# Altium PCB BattManage.PcbDoc
Units mm, origin at the board's own origin, x right, y up, seen from the top; angles counter-clockwise.
Board outline 63.12 x 72.39 mm, 2 copper layers (Top Layer, Bottom Layer), stack 1.569 mm thick; 61 components, 52 nets, 175 pads, 44 vias.
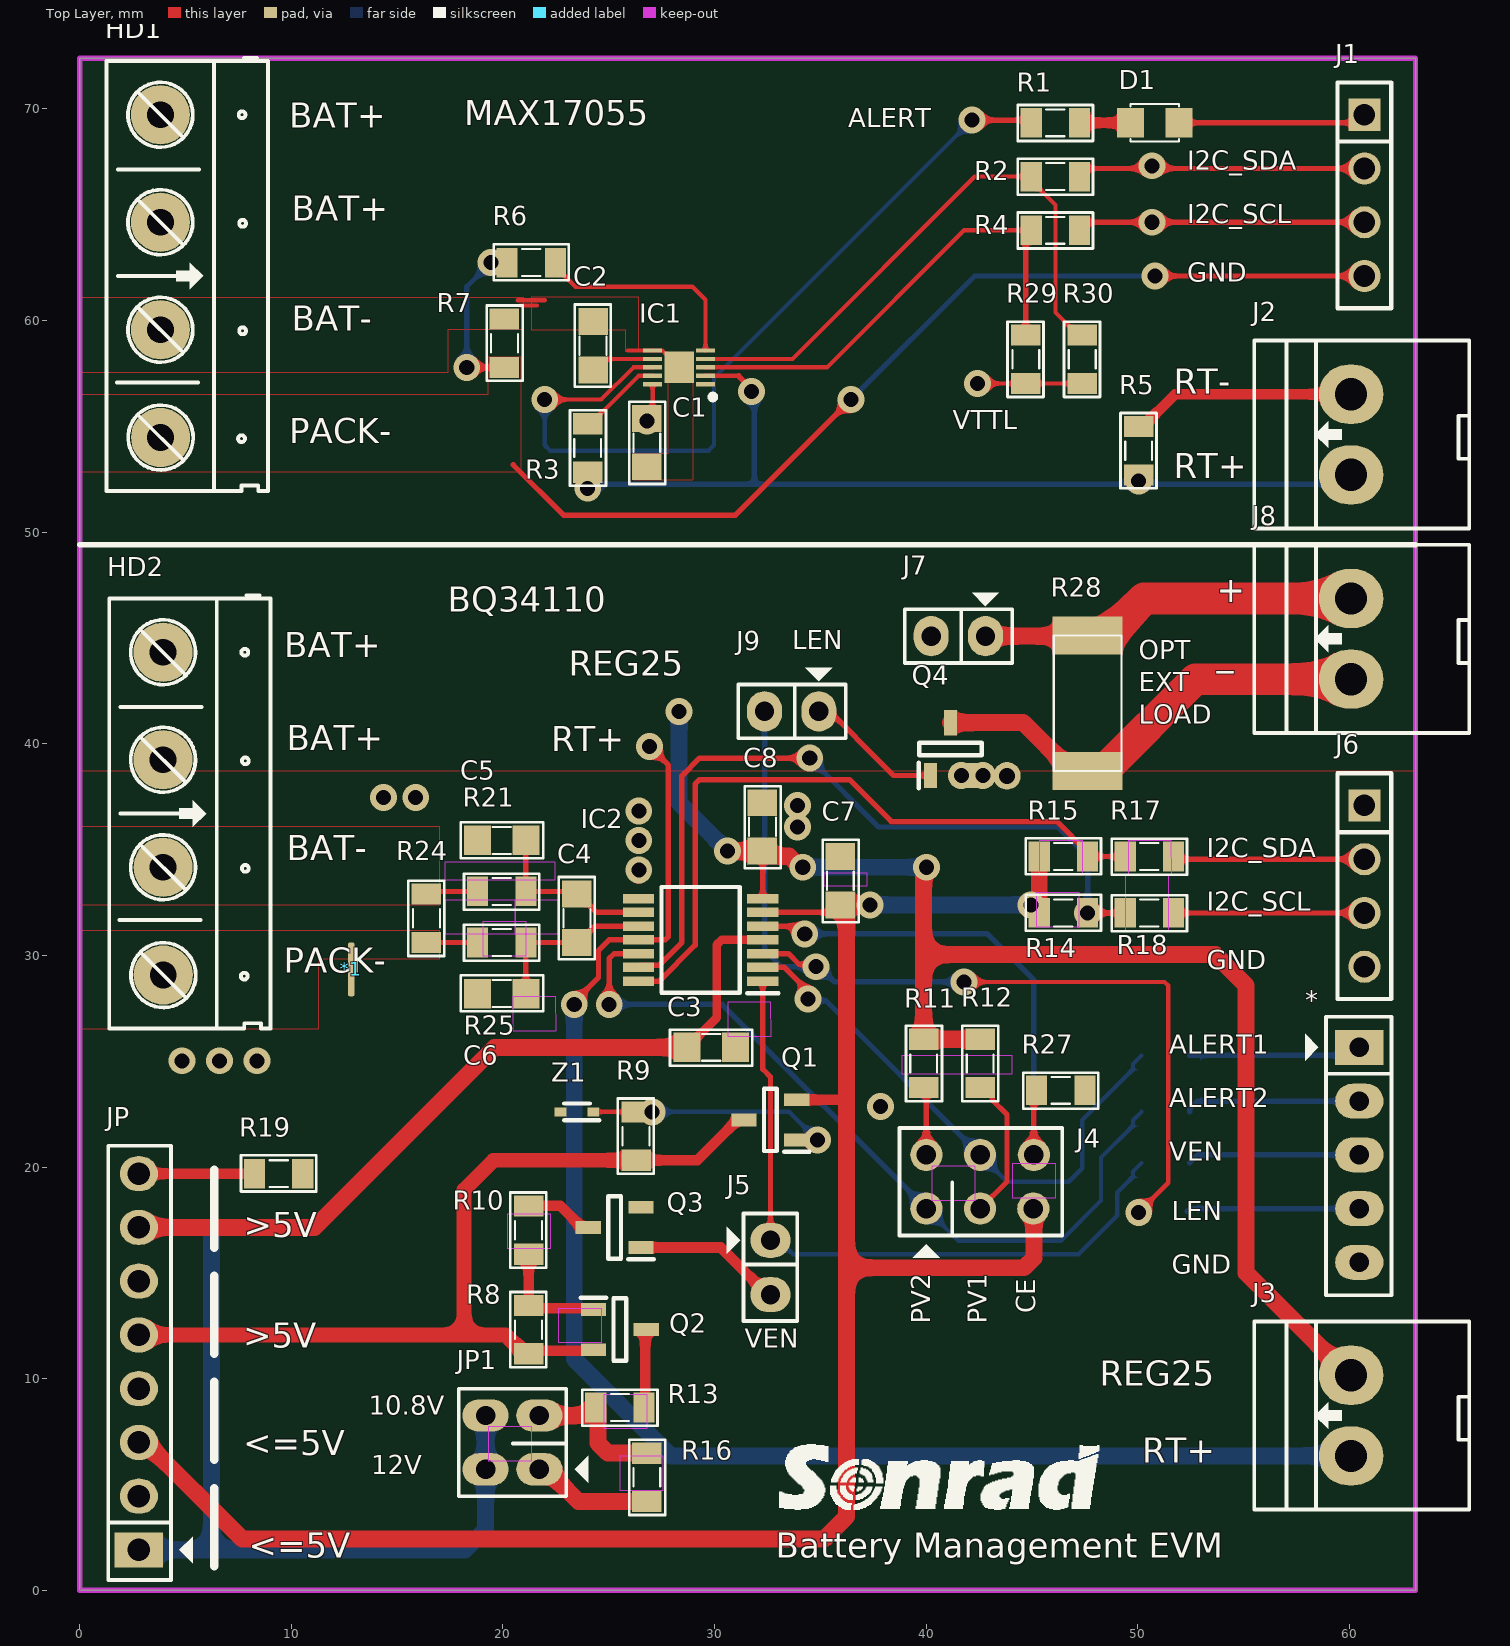
[diagram p0: Top Layer view]
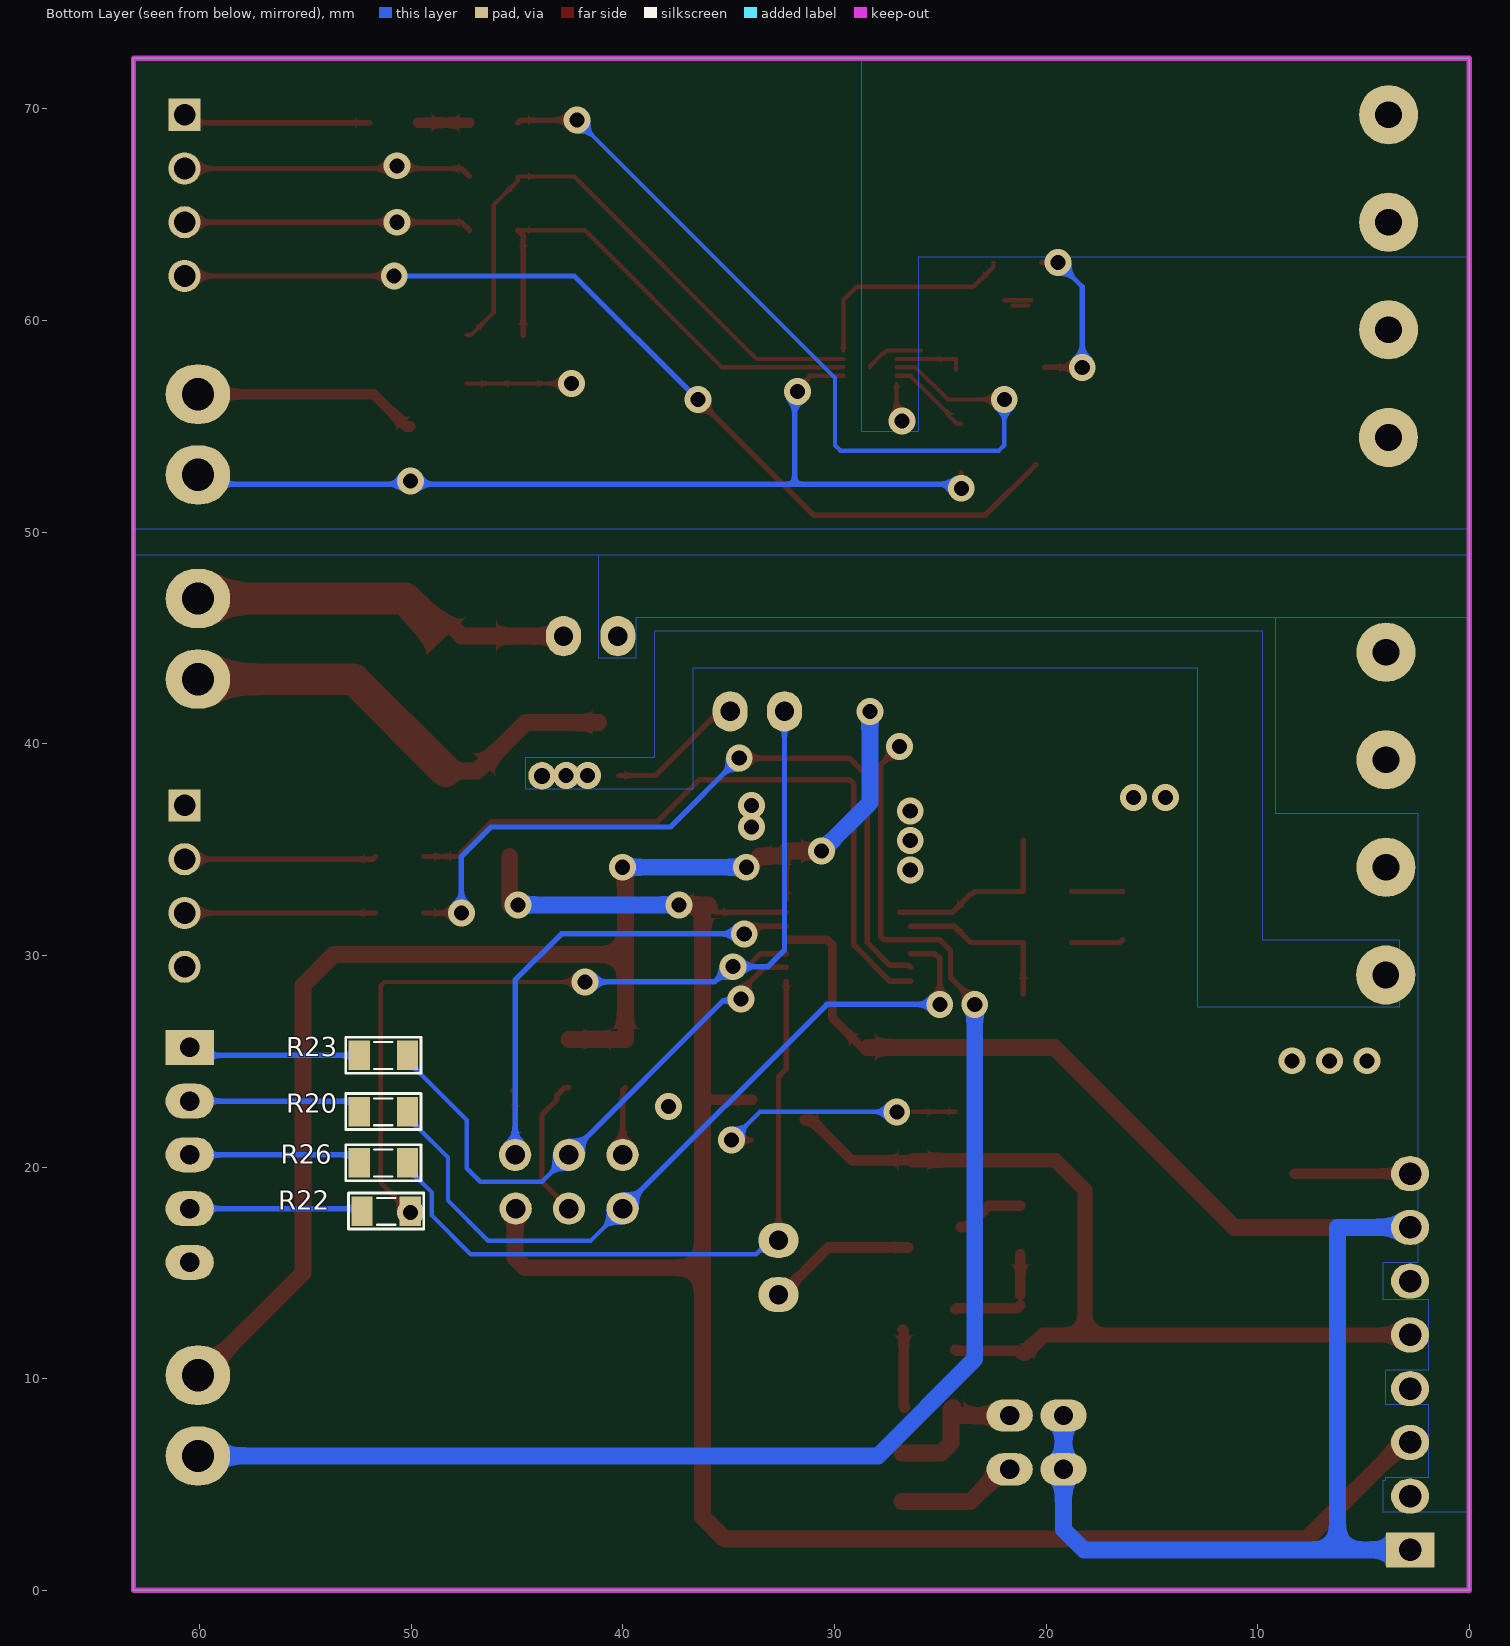
[diagram p1: Bottom Layer view, seen from below]
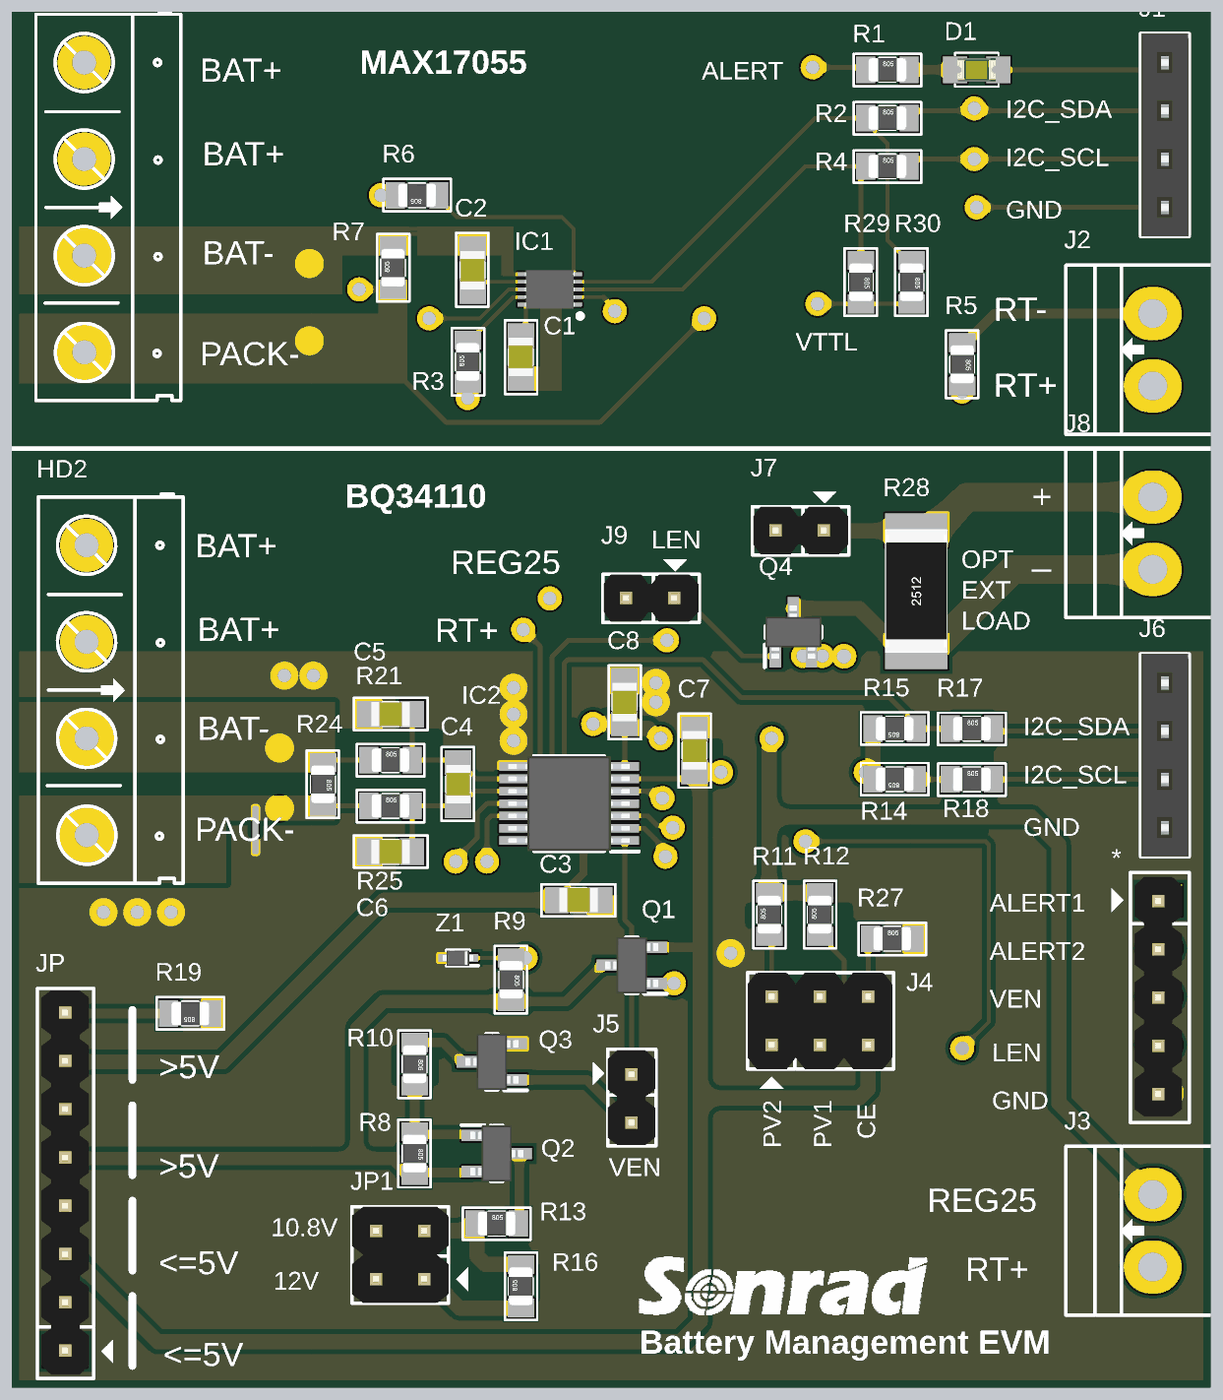
[diagram p2: 3D render of the assembled board from above, using the file's embedded part models]
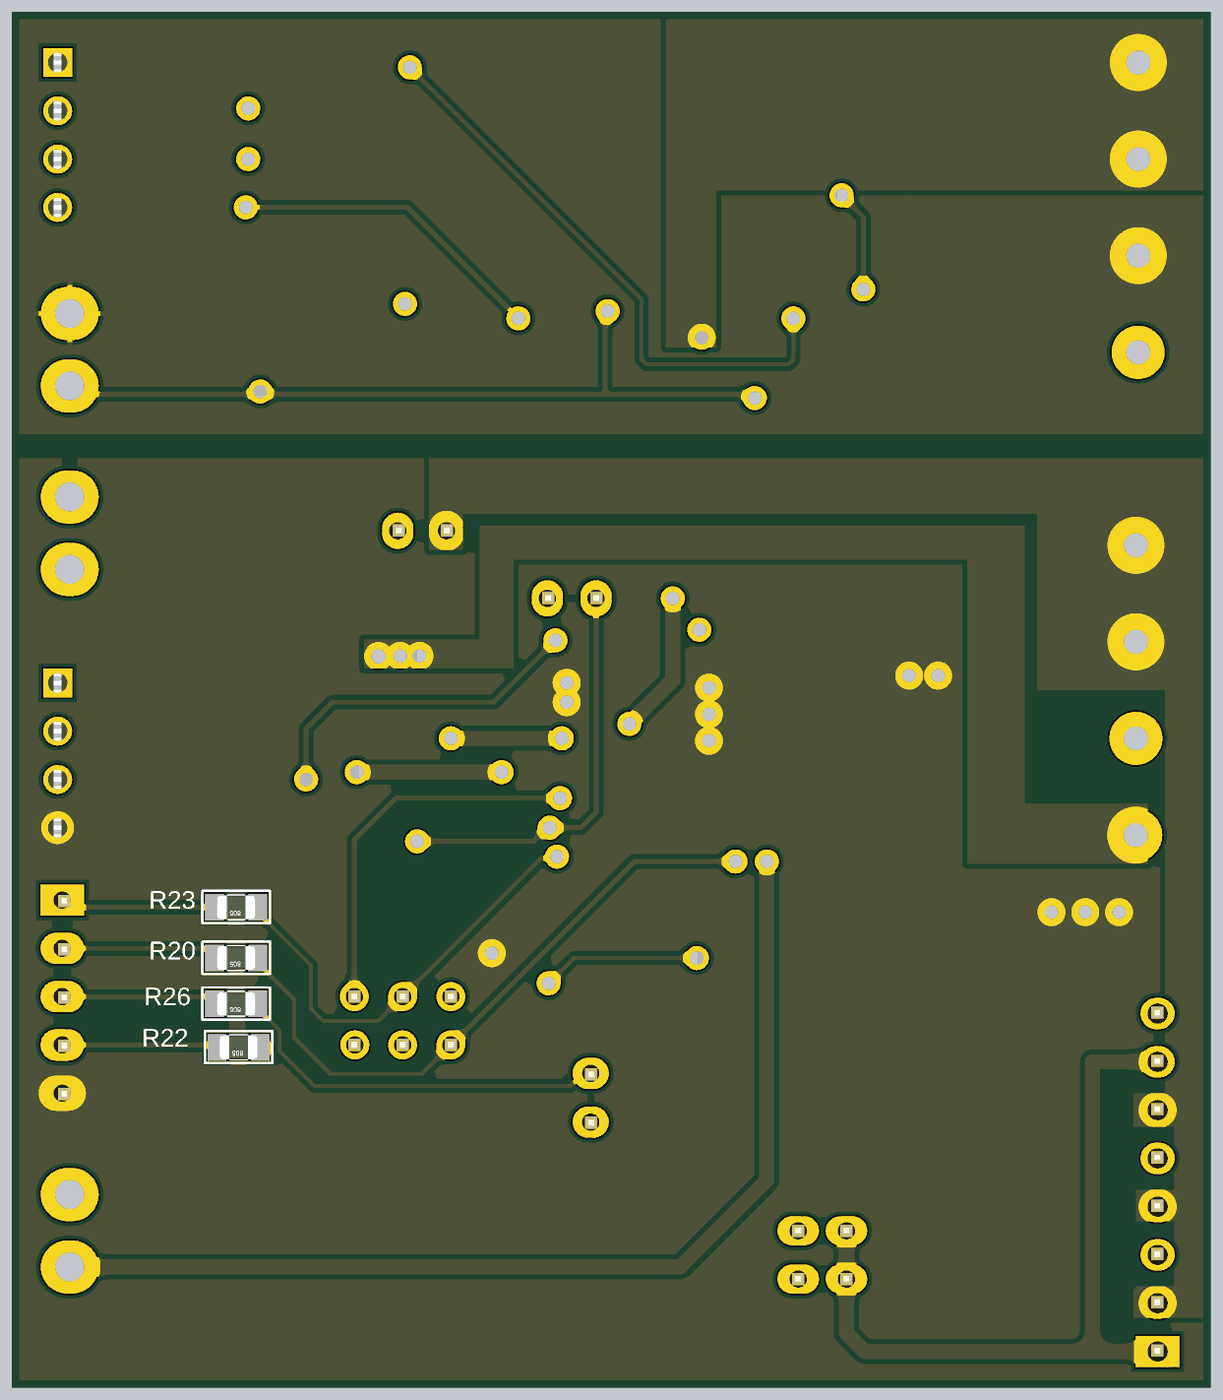
[diagram p3: 3D render of the assembled board from below, using the file's embedded part models]

## Layer stack, top to bottom
Top Solder: solder mask 0.0254, SM-001, Dk 4
Top Layer: signal copper 0.035
Dielectric 1: core 1.4986, Core-043, Dk 4.3
Bottom Layer: signal copper 0.035
Bottom Solder: solder mask 0.0254, SM-001, Dk 4

## Board outline
0,0 63.119,0 63.119,72.39 0,72.39

## Design rules (kind name [scope] priority, off if disabled: settings)
Clearance [All] p1: gap=0.254 ignorepadtopadclearanceinfootprint=FALSE except(0: Arc-Hole Track-Hole SMDPad-Hole THPad-Hole Via-Hole Fill-Hole Poly-Hole Region-Hole Text-Hole; 0.127: Arc-Arc Arc-Track Arc-SMDPad Track-Track Track-SMDPad SMDPad-SMDPad)
PlaneConnect [All] p1: planeconnectstyle=Direct reliefexpansion=0.508 reliefentries=4 reliefconductorwidth=0.254 reliefairgap=0.254
PolygonConnect [All] p1: connectstyle=Direct reliefconductorwidth=0.254 reliefentries=4 polygonreliefangle="90 Angle" airgapwidth=0.254
RoutingVias [All] p1: holewidth=0.711 width=1.27 viastyle="Through Hole" minholewidth=0.711 minwidth=1.27 maxholewidth=0.711 maxwidth=1.27
SolderMaskExpansion [All] p1: expansion=0.102 istentingtop=FALSE
Width [All] p1: maxlimit=0.8 minlimit=0.2 preferedwidth=0.254
29 further rules are at their usual default settings.

## Classes and differential pairs
component class MAX17055: C1 C2 D1 HD1 J1 J2 R1 R2 R3 R4 R5 R6 R7 R29 R30
component class BQ34110: * *1 C3 C4 C5 C6 C7 C8 HD2 IC2 J3 J5 J6 J7 J8 J9 JP JP1 Q1 Q2 Q3 Q4 R8 R9 R10 R11 R12 R13 R14 R15 R16 R17 R18 R19 R20 R21 R22 R23 R24 R25 R26 R27 R28 Z1

## Components (designator, comment, footprint, x,y, rotation, side; value= is the part's Value field where it differs from the comment)
* "JP5" JP5 60.463,25.654 r270 top
*1 "NetTie" NetTie 12.827,28.829 r0 top
C1 "104" "0805 CAP" 26.797,54.229 r90 top
C2 "0.47uF" "0805 CAP" 24.257,58.801 r270 top
C3 "3300pF" "0805 CAP" 29.845,25.654 r0 top
C4 "100nF" "0805 CAP" 23.495,31.75 r270 top
C5 "100nF" "0805 CAP" 19.939,35.433 r180 top
C6 "100nF" "0805 CAP" 19.939,28.194 r180 top
C7 "100nF" "0805 CAP" 35.941,33.528 r90 top
C8 "1uF" "0805 CAP" 32.258,36.068 r90 top
D1 "LED" LED-0805-Green 51.943,69.342 r180 top value="LED 3 - 5 ly 2 Colour"
HD1 "Header 4" HED4 3.81,69.723 r270 top
HD2 "Header 4" HED4 3.937,44.323 r270 top
IC1 "MAX17055ETB+T" SON40P250X200X80-11N 28.321,57.785 r180 top
IC2 "BQ34110PW" SOP65P640X120-14N 29.337,30.734 r180 top
J1 "JP4" JP4-C1T 60.706,69.723 r270 top
J2 "Header 2" HED2B 60.071,52.705 r90 top
J3 "Header 2" HED2B 60.071,6.35 r90 top
J4 "Connector 3x2" JP3x2 42.545,19.304 r0 top
J5 "Jumper 2" JP2 32.639,16.535 r270 top value="JP 2"
J6 "JP4" JP4-C1T 60.706,37.084 r270 top
J7 "Jumper 2" JP2 42.799,45.085 r180 top value="JP 2"
J8 "Header 2" HED2B 60.071,43.053 r90 top
J9 "Jumper 2" JP2 34.925,41.529 r180 top value="JP 2"
JP "JP8" JP8 2.794,1.905 r90 top
JP1 "JP2x2" JP2X2 21.717,5.715 r90 top
Q1 "AO3400" SOT95P280X125-3N 32.639,22.225 r180 top
Q2 "AO3401A" SOT95P280X125-3N 25.527,12.319 r0 top
Q3 "AO3400" SOT95P280X125-3N 25.273,17.145 r180 top
Q4 "AO3400" SOT95P280X125-3N 41.148,39.751 r90 top
R1 "1K" RES-SMD-0805 46.101,69.342 r0 top
R2 "150" RES-SMD-0805 46.101,66.802 r0 top
R3 "100" RES-SMD-0805 24.003,53.975 r90 top
R4 "150" RES-SMD-0805 46.101,64.262 r0 top
R5 "DNP" RES-SMD-0805 50.038,53.848 r270 top
R6 "0" RES-SMD-0805 21.336,62.738 r180 top
R7 "0.01" RES-SMD-0805 20.066,58.928 r90 top
R8 "100K" RES-SMD-0805 21.209,12.319 r270 top
R9 "10K" RES-SMD-0805 26.289,21.463 r270 top
R10 "165K" RES-SMD-0805 21.209,17.018 r270 top
R11 "100K" RES-SMD-0805 39.878,24.892 r90 top
R12 "100K" RES-SMD-0805 42.545,24.892 r90 top
R13 "220K" RES-SMD-0805 25.527,8.636 r0 top
R14 "10K" RES-SMD-0805 46.482,32.004 r180 top
R15 "10K" RES-SMD-0805 46.482,34.671 r180 top
R16 "20K" RES-SMD-0805 26.797,5.334 r90 top
R17 "100" RES-SMD-0805 50.546,34.671 r0 top
R18 "100" RES-SMD-0805 50.546,32.004 r0 top
R19 "16.5K" RES-SMD-0805 9.398,19.685 r180 top
R20 "100" RES-SMD-0805 51.308,25.273 r0 bottom
R21 "100" RES-SMD-0805 19.939,33.02 r0 top
R22 "100" RES-SMD-0805 51.308,22.606 r0 bottom
R23 "100" RES-SMD-0805 51.308,20.193 r0 bottom
R24 "0.01" RES-SMD-0805 16.383,31.75 r270 top
R25 "100" RES-SMD-0805 19.939,30.607 r0 top
R26 "100" RES-SMD-0805 51.181,17.907 r0 bottom
R27 "1M" RES-SMD-0805 46.355,23.622 r0 top
R28 "20R" RES-SMD-2512 47.752,41.91 r90 top
R29 "10K" RES-SMD-0805 44.704,58.166 r270 top
R30 "10K" RES-SMD-0805 47.371,58.166 r270 top
Z1 "BZT52C5V6T-7" SODFL1608X65N 23.495,22.606 r180 top

## Footprints (in the part's own frame and the unit in brackets; to place one, negate y for a bottom-side part, rotate by r counter-clockwise, add the part's x,y. Pads: shape width x height; smd on the part's side, far side on the other; paste and mask are expansions set on the pad)
"0805 CAP" [mil] "Compoment SMD 80x50mil"
  rect 50x55 smd: 1(-45,0) 2(45,0)
  silkscreen extent -77,-34 76,33, body extent -40,-25 40,25, height 24
HED2B [mil] "Header 2, 2 pin, hight 300mil, Pin to Pin 150, Colour White"
  oval 110x120 hole 60: 1(0,0) 2(150,0)
  silkscreen extent -100,-220 250,180
HED4 [mil] "Header 4, 4 pin, hight 300mil, Pin to Pin 200, Colour Green"
  round 110 hole 50: 1(0,0) 2(200,0) 3(400.06,0.06) 4(600.39,0.39)
  silkscreen extent -106,-100 700,200
JP2 [mil]
  oval 65x75 hole 36: 1(0,0) 2(101,0)
  silkscreen extent -50,-81 150,50, body extent -48,-50 148,48, height 323
JP2X2 [mil]
  oval 60x86 hole 36: 1(0,0) 2(100,0) 3(100,100) 4(0,100)
  silkscreen extent -50,-91 150,150, body extent -50,-50 150,150, height 335
JP3x2 [mil] "Connector 3x2"
  round 60 hole 36: 1(-100,-50) 2(0,-50) 3(99,-50) 4(-100,50) 5(0,50) 6(100,50)
  silkscreen extent -150,-141 153,100, body extent -150,-100 150,100, height 335
JP4-C1T [mm] "4 row, straight, gold plating"
  rect 1.52x1.52 hole 1.02: 1(0,0)
  round 1.52 hole 1.02: 2(2.54,0) 3(5.08,0) 4(7.62,0)
  silkscreen extent -1.52,-1.27 9.14,1.27, body extent -1.52,-1.25 9.14,1.25, height 8.51
JP5 [mil] "JP5"
  rect 65x90 hole 36: 1(0,0)
  oval 65x90 hole 36: 2(100,0) 3(200,0) 4(300,0) 5(400,0)
  silkscreen extent -57,-101 461,60, body extent -48,-53 448,45, height 323
JP8 [mil] "JP8"
  rect 65x90 hole 42: 1(0,0)
  oval 65x70.87 hole 42: 2(100,0) 3(200,0) 4(300,0) 5(400,0) 6(500,0) 7(600,0) 8(700,0)
  silkscreen extent -56,-100 752,57, body extent -48,-50 748,48, height 323
LED-0805-Green [mil]
  rect 50x55 smd: 1(0,0) 2(90,0)
  silkscreen extent 0,-35 90,35, body extent 5,-25 85,25, height 43
NetTie [mil]
  rrect50% 11.81x60 smd: 1(0,40) 2(0,0)
RES-SMD-0805 [mil]
  rect 39.37x55 smd: 1(-45,0) 2(45,0)
  silkscreen extent -70,-34 70,33, body extent -39,-25 39,25, height 31
RES-SMD-2512 [mm] "Chip Capacitor, Body 3.2x2.5mm, IPC Medium Density"
  rect 1.8x3.3 smd: 1(-3.2,0.127) 2(3.2,0.127)
  silkscreen extent -3.2,-1.47 3.2,1.73, body extent -3.2,-1.47 3.2,1.73, height 0.6
SODFL1608X65N [mm]
  rect 0.55x0.42 smd: 1(-0.775,0) 2(0.775,0)
  silkscreen extent -1.05,-0.4 0.6,0.4, body extent -0.8,-0.4 0.8,0.4, height 0.65
SON40P250X200X80-11N [mm]
  rect 0.9x0.2 smd: 1(-1.25,0.8) 2(-1.25,0.4) 3(-1.25,0) 4(-1.25,-0.4) 5(-1.25,-0.8) 6(1.25,-0.8) 7(1.25,-0.4) 8(1.25,0) 9(1.25,0.4) 10(1.25,0.8)
  rect 1.4x1.5 smd: 11(0,0)
  silkscreen extent -1.73,1.28 -1.48,1.52, body extent -1.3,-1 1.3,1, height 0.8
SOP65P640X120-14N [mm]
  rect 1.475x0.45 smd: 1(-2.938,1.95) 2(-2.938,1.3) 3(-2.938,0.65) 4(-2.938,0) 5(-2.938,-0.65) 6(-2.938,-1.3) 7(-2.938,-1.95) 8(2.938,-1.95) 9(2.938,-1.3) 10(2.938,-0.65) 11(2.938,0) 12(2.938,0.65) 13(2.938,1.3) 14(2.938,1.95)
  silkscreen extent -3.67,-2.5 1.85,2.52, body extent -3.2,-2.5 3.2,2.5, height 1.2
SOT95P280X125-3N [mm]
  rect 1.2x0.6 smd: 1(-1.25,0.95) 2(-1.25,-0.95) 3(1.25,0)
  silkscreen extent -1.85,-1.48 0.3,1.5, body extent -1.4,-1.48 1.4,1.48, height 1.25

## Part data
C1 C2 C3 C4 C5 C6 C7 C8: library part "CAP CERAMIC", LatestRevisionDate=17-Jul-2002, LatestRevisionNote="Re-released for DXP Platform.", PackageReference=RAD-0.3, Published=8-Jun-2000, Publisher="Altium Limited"
D1: library part "LED SMD"
HD1 HD2: library part Hed4, "Header 4 (Green)"
IC1: "Integrated Circuit", Manufacturer_Name="Maxim Integrated", Mouser Part Number=700-MAX17055ETB+T, Arrow Part Number=MAX17055ETB+T, Datasheet Link=https://datasheets.maximintegrated.com/en/ds/MAX17055.pdf, Height=0.8mm, Manufacturer_Part_Number=MAX17055ETB+T, Mouser Price/Stock=https://www.mouser.co.uk/ProductDetail/Maxim-Integrated/MAX17055ETB%2bT?qs=u4fy%2FsgLU9MiRW9MH4Zm9g%3D%3D
IC2: "Integrated Circuit", Manufacturer_Name="Texas Instruments", Mouser Part Number=595-BQ34110PW, Arrow Part Number=BQ34110PW, Arrow Price/Stock=https://www.arrow.com/en/products/bq34110pw/texas-instruments, Datasheet Link=http://www.ti.com/lit/gpn/bq34110, Height=1.2mm, Manufacturer_Part_Number=BQ34110PW, Mouser Price/Stock=https://www.mouser.co.uk/ProductDetail/Texas-Instruments/BQ34110PW?qs=OEYMhS7p3YbAd6vB%252BTGmNQ%3D%3D
J1 J6: "WR-PHD 2.54 mm Angled Socket Header", Manufacturer="W¨¹rth Elektronik eiSos GmbH", partNo=613004143121, ComponentLink1 Description=Manufacturer, ComponentLink1URL=http://www.we-online.com, ComponentLink2 Description=Datasheet, ComponentLink2URL=http://katalog.we-online.de/em/datasheet/6130xx143121.pdf, Created by="Karrer Zheng", Created Date="29 March 2013", NoPins=04
J2 J3 J8: library part Hed2, "Header 2 (Green)"
J4: library part JP3x2
J5 J7 J9: library part "JP 2"
Q1 Q3 Q4: "MOSFET (N-Channel)", Manufacturer_Name="Alpha & Omega Semiconductors", Arrow Part Number=AO3400, Arrow Price/Stock=https://www.arrow.com/en/products/ao3400/alpha-and-omega-semiconductor, Datasheet Link=http://aosmd.com/res/data_sheets/AO3400.pdf, Height=1.25mm, Manufacturer_Part_Number=AO3400
Q2: "MOSFET (P-Channel)", Manufacturer_Name="Alpha & Omega Semiconductors", Arrow Part Number=AO3401A, Arrow Price/Stock=https://www.arrow.com/en/products/ao3401a/alpha-and-omega-semiconductor, Datasheet Link=http://www.aosmd.com/pdfs/datasheet/AO3401A.pdf, Height=1.25mm, Manufacturer_Part_Number=AO3401A
R1 R2 R3 R4 R5 R6 R7 R8 R9 R10 R11 R12 R13 R14 R15 R16 R17 R18 R19 R20 R21 R22 R23 R24 R25 R26 R27 R28 R29 R30: library part Res-SMD, "Resistor", Manufacturer="Generic Components", Class=Passive, Published=08/06/2000, Publisher="Altium Hobart Technology Centre"
Z1: "Zener Diode", Manufacturer_Name="Diodes Inc.", Mouser Part Number=621-BZT52C5V6T-7, Arrow Part Number=BZT52C5V6T-7, Arrow Price/Stock=https://www.arrow.com/en/products/bzt52c5v6t-7/diodes-incorporated, Datasheet Link=https://www.mouser.com/datasheet/2/115/ds30502-1142513.pdf, Height=0.65mm, Manufacturer_Part_Number=BZT52C5V6T-7, Mouser Price/Stock=https://www.mouser.co.uk/ProductDetail/Diodes-Incorporated/BZT52C5V6T-7/?qs=zLeapIUCO8Tm%252BIuaCPAdkQ%3D%3D

## Free pads (board coordinates)
  round 1.524 on Top Solder: 2(14.097,30.48) 2(14.097,33.655) 2(15.669,55.083) 2(15.669,59.147)
  round 1.3 hole 0.762: 3(43.815,38.481)

## Via types
v1: diameter 1.27, hole 0.711, Top Layer to Bottom Layer, 44 vias

## Nets (pads, with @x,y where several pads share a name; then routed paths per layer and width w, separated by ;. In a path a pad name is that pad's centre, name@x,y a point inside that pad or via, vN(x,y) a via of type N, cw(c..) or ccw(c..) an arc to the next point about the centre after c; other vN are vias at no path point)
ALR1: IC2.2 J4.5 R20.1 | length 26.3
  Top Layer w0.254: IC2.2 33.304,29.434 34.417,28.321 v1(34.417,27.94)
  Bottom Layer w0.2: J4.5 43.815,19.304 46.736,19.304 47.371,19.939 47.371,22.225 49.765,24.619 49.765,24.873 R20.1
  Bottom Layer w0.254: v1(34.417,27.94) 34.5,27.857 35.262,27.857 J4.5
ALR2: IC2.12 J4.1 R22.1 | length 37.3
  Top Layer w0.254: v1(25.019,27.686) 25.019,29.845 25.258,30.084 IC2.12
  Bottom Layer w0.2: J4.1 41.529,16.51 46.355,16.51 48.26,18.415 48.26,20.447 49.765,21.952 49.765,22.206 R22.1
  Bottom Layer w0.254: v1(25.019,27.686) 30.353,27.686 J4.1
ALRT: IC1.8 R1.1 | length 39.4
  Top Layer w0.2: v1(21.971,56.261) 24.638,56.261 26.162,57.785 IC1.8
  Top Layer w0.254: v1(42.164,69.469) 44.831,69.469 R1.1
  Bottom Layer w0.2: v1(21.971,56.261) 21.971,54.102 22.225,53.848 29.718,53.848 29.972,54.102 29.972,57.277 v1(42.164,69.469)
BAT: C3.1 IC2.4 JP1.3 JP1.4 JP.1 JP.7 | length 78.3
  Top Layer w0.4: C3.1 30.099,27.051 30.099,30.5 30.333,30.734 IC2.4
  Top Layer w0.8: JP.7 11.095,17.145 19.604,25.654 C3.1@28.448,25.654
  Bottom Layer w0.8: JP.1@2.476,1.905 JP.1 6.223,1.905 ; JP.7@2.476,17.145 JP.7 6.223,17.145 6.223,1.905 ; JP1.3 JP1.4 19.177,2.87 18.212,1.905 6.223,1.905
BAT+: HD2.1 HD2.2 J7.2 JP.2 JP.4 JP.6
BAT-: HD2.3 R21.1 R24.1 | length 2.4
  Top Layer w0.254: R24.1@16.383,33.02 R21.1
GND: HD1.4 J1.4 R6.2 R7.1 | length 53.9
  Top Layer w0.254: v1(18.288,57.785) R7.1 ; v1(19.431,62.738) R6.2 ; 20.476,53.184 22.86,50.8 30.988,50.8 v1(36.449,56.261) ; v1(50.8,62.103) J1.4
  Bottom Layer w0.254: v1(18.288,57.785) 18.288,61.595 v1(19.431,62.738) ; v1(36.449,56.261) 42.291,62.103 v1(50.8,62.103)
LEN: IC2.3 J9.2 R26.1 | length 45.8
  Top Layer w0.2: v1(41.783,28.746) 51.264,28.746 51.435,28.575 51.435,19.253 v1(50.038,17.856)
  Top Layer w0.254: IC2.3 33.483,30.084 33.986,29.581 34.681,29.581 v1(34.798,29.464)
  Bottom Layer w0.254: J9.2@32.36,42.164 32.36,30.251 33.147,29.464 34.947,29.464 35.664,28.746 v1(41.783,28.746)
Net*_1: *.1 R20.2 | length 8.2
  Bottom Layer w0.254: R20.2 60.082,25.273 *.1
Net*_2: *.2 R22.2 | length 8.3
  Bottom Layer w0.254: R22.2 52.451,22.741 52.824,23.114 *.2
Net*_3: *.3 R23.2 | length 8.2
  Bottom Layer w0.254: R23.2 52.451,20.201 52.824,20.574 *.3
Net*_4: *.4 R26.2 | length 8.2
  Bottom Layer w0.254: R26.2 52.451,18.034 *.4
NetC2_2: C2.2 IC1.7 | length 3.3
  Top Layer w0.2: C2.2 24.257,58.185 IC1.7
NetD1_1: D1.1 J1.1 | length 8.9
  Top Layer w0.254: D1.1 60.325,69.342 J1.1
NetD1_2: D1.2 R1.2 | length 2.4
  Top Layer w0.5: R1.2 D1.2
NetIC1_5: IC1.5 R6.1 | length 10.3
  Top Layer w0.2: R6.1 22.479,62.54 22.879,62.139 23.424,61.595 28.956,61.595 29.571,60.98 IC1.5
NetIC1_9: IC1.9 R3.2 | length 4
  Top Layer w0.2: R3.2 24.201,55.118 24.602,55.518 24.602,55.59 26.397,57.385 IC1.9
NetIC2_5: IC2.5 J4.6 R27.1 | length 25.2
  Top Layer w0.254: IC2.5 33.894,31.384 v1@34.191,31.087 ; v1@34.191,31.086 v1(34.259,31.018) ; J4.6 45.085,23.495 R27.1
  Bottom Layer w0.254: v1(34.259,31.018) 42.896,31.018 45.085,28.829 J4.6
NetJ1_2: J1.2 R2.2 | length 13.6
  Top Layer w0.254: R2.2 47.244,66.81 47.617,67.183 J1.2
  other v1: 50.673,67.31
NetJ1_3: J1.3 R4.2 | length 13.6
  Top Layer w0.254: R4.2 47.244,64.27 47.617,64.643 J1.3
  other v1: 50.673,64.643
NetJ4_2: J4.2 R12.1 | length 6.9
  Top Layer w0.254: J4.2 43.815,19.304 43.815,22.479 43.116,23.177 43.116,23.376 42.743,23.749 R12.1
NetJ4_4: J4.4 R11.1 | length 3.2
  Top Layer w0.254: R11.1 40.005,23.622 J4.4
NetJ5_2: J5.2 Q3.1 | length 7
  Top Layer w0.5: Q3.1 30.287,16.195 32.512,13.97 J5.2
NetJ6_2: J6.2 R17.2 | length 9.1
  Top Layer w0.254: R17.2 51.816,34.544 J6.2
NetJ6_3: J6.3 R18.2 | length 9
  Top Layer w0.254: R18.2 J6.3
NetJ7_1: J7.1 J8.2 R28.2 | length 18
  Top Layer w0.8: J7.1 R28.2@47.625,45.085 ; R28.2 48.125,45.61 R28.2@49.039,45.61
  Top Layer w1.5: R28.2@49.039,45.61 50.292,46.863 J8.2
NetJ8_1: J8.1 Q4.3 R28.1 | length 21.7
  Top Layer w0.8: Q4.3 44.584,41.001 46.875,38.71 R28.1 R28.1@48.375,38.71
  Top Layer w1.5: R28.1@48.375,38.71 52.718,43.053 J8.1
NetJ9_1: J9.1 Q4.1 | length 6.9
  Top Layer w0.254: J9.1@34.925,42.164 34.925,42.037 38.461,38.501 Q4.1
NetJP1_1: JP1.1 R16.1 | length 5.7
  Top Layer w0.8: JP1.1 22.047,5.715 23.571,4.191 R16.1
NetJP1_2: JP1.2 R13.1 R16.2 | length 7.2
  Top Layer w0.8: JP1.2 24.201,8.255 24.384,8.438 R13.1 24.484,8.536 24.484,6.946 24.953,6.477 R16.2
NetJP_5: JP.5 Q1.3 Q2.2 R8.2 R9.2 | length 43.4
  Top Layer w0.5: R8.2@21.011,11.176 R8.2 21.352,11.319 24.227,11.319 Q2.2 ; R9.2 29.184,20.32 31.089,22.225 Q1.3
  Top Layer w0.7: JP.5 18.161,12.065 ; R8.2@21.011,11.176 20.122,12.065 18.161,12.065 ; R9.2 19.558,20.32 18.161,18.923 18.161,12.065
NetJP_8: JP.8 R19.2 | length 5.5
  Top Layer w0.5: JP.8 R19.2
NetQ1_1: Q1.1 R9.1 Z1.1 | length 11.3
  Top Layer w0.2: Z1.1 R9.1 ; Q1.1 v1(34.859,21.275)
  Bottom Layer w0.2: v1(27.051,22.606) 33.528,22.606 v1(34.859,21.275)
NetQ2_1: Q2.1 R8.1 R10.2 | length 5.1
  Top Layer w0.5: R8.1 21.352,13.319 24.227,13.319 Q2.1 ; 21.209,13.97 R10.2
NetQ2_3: Q2.3 R13.2 | length 3.7
  Top Layer w0.5: R13.2 26.724,8.689 26.724,12.269 26.773,12.319 Q2.3
NetQ3_3: Q3.3 R10.1 | length 3.2
  Top Layer w0.5: R10.1 22.707,18.161 23.723,17.145 Q3.3
PACK-: *1.1 HD2.4 pad.3 Q4.2 R24.2 R25.1 | length 3
  Top Layer w0.254: R24.2@16.383,30.734 16.51,30.607 R25.1
  Top Layer w0.8: v1@41.529,38.501 Q4.2
  other v1: 41.656,38.501 42.672,38.501
PGND: *1.2 *.5 C3.2 C5.2 C6.2 C7.2 C8.2 IC2.8 J6.4 Q3.2 R19.1 R27.2 Z1.2 | length 0.5
  Top Layer w0.8: v1@26.416,33.782 v1(26.416,34.036) ; v1@26.416,35.306 v1(26.416,35.433) ; v1(26.416,36.83) v1@26.416,36.957
  other v1: 37.846,22.86 4.826,25.019 6.604,25.019 8.382,25.019 33.909,36.068 33.909,37.084 14.351,37.465 15.875,37.465
REG25: C8.1 IC2.7 J3.2 R11.2 R12.2 | length 66.7
  Top Layer w0.254: IC2.7 C8.1@32.275,34.908
  Top Layer w0.8: v1(30.607,34.925) C8.1 32.275,34.908 32.493,34.69 33.509,34.69 34.036,34.163 v1(34.163,34.163) ; v1(40.005,34.163) 39.878,34.036 39.878,30.035 ; R12.2 R11.2 39.878,30.035 ; J3.2 59.944,10.16 55.118,14.986 55.118,28.575 53.658,30.035 39.878,30.035
  Bottom Layer w0.8: v1(28.321,41.529) 28.321,37.211 v1(30.607,34.925) ; v1(34.163,34.163) v1(40.005,34.163)
REGIN: C7.1 IC2.6 J4.3 JP.3 Q1.2 R14.2 R15.2 | length 93.7
  Top Layer w0.254: IC2.6 35.59,32.034 C7.1 ; 36.178,23.175 36.239,23.114
  Top Layer w0.5: Q1.2 36.178,23.175
  Top Layer w0.8: JP.3 3.111,6.985 7.683,2.413 35.179,2.413 36.239,3.473 36.239,15.24 ; C7.1 C7.1@36.005,32.385 ; v1(37.338,32.385) C7.1@36.005,32.385 ; J4.3 45.085,18.009 45.085,15.709 44.616,15.24 36.239,15.24 ; R14.2@45.339,32.385 R15.2 ; C7.1@36.005,32.385 36.239,32.15 36.239,23.114 36.239,15.24
  Bottom Layer w0.8: v1(37.338,32.385) v1(44.958,32.385)
RT2+: IC2.11 J3.1 | length 71.2
  Top Layer w0.254: v1@23.368,27.813 24.511,28.956 24.511,30.226 25.019,30.734 IC2.11 27.664,30.734 27.813,30.883 27.813,38.989 v1(26.924,39.878)
  Bottom Layer w0.8: v1(23.368,27.686) 23.368,10.922 27.94,6.35 J3.1
RT+: IC1.2 J2.1 R3.1 R5.2 | length 44.4
  Top Layer w0.2: v1(24.003,52.07) R3.1 ; IC1.2 31.134,57.385
  Top Layer w0.254: 31.134,57.385 31.75,56.769 v1(31.75,56.642) ; v1(50.038,52.414) R5.2
  Bottom Layer w0.254: v1(24.003,52.07) 24.197,52.264 31.877,52.264 ; v1(31.75,56.642) 31.877,56.515 31.877,52.264 ; J2.1 59.63,52.264 31.877,52.264
SCL: IC1.3 R4.1 R29.1 | length 23.1
  Top Layer w0.2: IC1.3 35.306,57.785 41.783,64.262 R4.1
  Top Layer w0.254: R29.1 44.704,64.008 R4.1
SCL2: IC2.13 R14.1 R18.1 | length 36.3
  Top Layer w0.254: IC2.13 26.497,29.532 27.373,29.532 28.448,30.607 28.448,38.481 29.288,39.321 v1(34.495,39.321) ; v1(47.625,32.004) R18.1
  Bottom Layer w0.254: v1(34.495,39.321) 37.748,36.068 46.228,36.068 47.625,34.671 v1(47.625,32.004)
SDA: IC1.4 R2.1 R30.1 | length 27.6
  Top Layer w0.2: IC1.4 33.674,58.185 42.291,66.802 R2.1 44.958,66.604 46.101,65.46 46.101,60.381 47.173,59.309 R30.1
SDA2: IC2.14 R15.1 R17.1 | length 33
  Top Layer w0.254: IC2.14 27.387,28.784 29.083,30.48 29.083,38.1 29.288,38.305 36.371,38.305 38.354,36.322 46.172,36.322 47.625,34.869 R15.1 R17.1
SRN: C4.2 C6.1 IC2.10 R25.2 | length 8.1
  Top Layer w0.254: C6.1 R25.2 C4.2 23.558,30.607 24.336,31.384 IC2.10
SRP: C4.1 C5.1 IC2.9 R21.2 | length 8.7
  Top Layer w0.254: C5.1 R21.2 23.368,33.02 C4.1 23.558,32.893 24.418,32.034 IC2.9 IC2.9@26.924,32.034
VBAT+: C1.2 HD1.1 HD1.2 IC1.10 | length 1.6
  Top Layer w0.2: C1.2@27.071,55.372 IC1.10
  other v1: 26.797,55.245
VBAT-: C1.1 C2.1 HD1.3 IC1.6 IC1.11 J2.2 R5.1 R7.2 | length 15.5
  Top Layer w0.2: 20.701,60.96 21.971,60.96 ; 20.828,60.706 21.59,60.706 ; 25.908,58.585 IC1.6 27.521,58.585 27.671,58.435 27.721,58.435 28.321,57.835 IC1.11
  Top Layer w0.5: R5.1 50.236,54.991 51.76,56.515 J2.2
VEN: IC2.1 J5.1 R23.1 | length 32.8
  Top Layer w0.254: IC2.1 32.275,24.621 32.639,24.257 J5.1
  Bottom Layer w0.2: J5.1 33.037,16.535 33.697,15.875 47.188,15.875 49.022,17.709 49.022,18.796 49.765,19.539 49.765,19.793 R23.1
VTTL: R29.2 R30.2 | length 5
  Top Layer w0.2: v1(42.418,57.023) R29.2 R30.2
pads on no net: IC1.1 J6.1

## Polygon pours and split planes (outlines as drawn)
PGND on Top Layer "NONET_L02_P-001" (solid, remove dead copper, shelved, pour order 17): 0,38.735 63.119,38.735 63.119,0 0,0
VBAT- on Top Layer "NONET_L02_P-001" (solid, shelved, pour order 6): 26.162,53.721 27.808,53.721 27.808,58.42 28.956,58.42 28.956,52.451 26.162,52.451
PACK- on Top Layer "NONET_L02_P-001" (solid, shelved, pour order 9): 0,26.543 11.303,26.543 11.303,29.845 17.018,29.845 17.018,31.159 0,31.159
BAT- on Top Layer "NONET_L02_P-001" (solid, shelved, pour order 10): 17.018,32.385 17.018,36.068 0,36.068 0,32.385
VBAT- on Top Layer "NONET_L02_P-001" (solid, shelved, pour order 2): 21.336,61.087 21.336,59.563 25.781,59.563 25.781,58.547 26.416,58.547 26.416,61.087
VBAT- on Top Layer "NONET_L02_P-001" (solid, shelved, pour order 1): 0,61.087 20.955,61.087 20.955,59.563 17.399,59.563 17.399,57.531 0,57.531
GND on Top Layer "NONET_L02_P-001" (solid, shelved, pour order 0): 0,56.515 19.304,56.515 19.304,58.293 20.828,58.293 20.828,52.832 0,52.832
VBAT- on Bottom Layer "NONET_L02_P-001" (solid, shelved, pour order 8): 63.119,50.165 0,50.165 0,72.39 63.155,72.39 63.155,50.185
PGND on Bottom Layer "NONET_L02_P-001" (solid, remove dead copper, shelved, pour order 20): 0,48.895 63.119,48.895 63.119,0 0,0
VBAT+ on Bottom Layer "NONET_L02_P-001" (solid, shelved, pour order 4): 0,72.39 0,62.992 26.035,62.992 26.035,54.737 28.702,54.737 28.702,72.39 5.161,72.39
BAT+ on Bottom Layer "NONET_L02_P-001" (solid, shelved, pour order 16): 0,48.895 41.148,48.895 41.148,44.069 39.37,44.069 39.37,45.974 0,45.974
PACK- on Bottom Layer "NONET_L02_P-001" (solid, shelved, pour order 15): 3.302,27.559 12.827,27.559 12.827,43.561 36.703,43.561 36.703,37.846 44.577,37.846 44.577,39.37 38.481,39.37 38.481,45.339 9.779,45.339 9.779,30.734 3.302,30.734
BAT+ on Bottom Layer "NONET_L02_P-001" (solid, shelved, pour order 14): 9.144,45.974 0,45.974 0,3.683 4.064,3.683 4.064,5.207 3.937,5.207 3.937,5.334 1.905,5.334 1.905,8.763 3.937,8.763 3.937,10.414 1.905,10.414 1.905,13.716 4.064,13.716 4.064,15.494 2.413,15.494 2.413,36.703 9.144,36.703

## Keep-outs
Top Layer:
  region: 44.043,25.273 44.046,24.394 38.862,24.394 38.862,25.273
  region: 32.636,27.813 32.642,26.162 30.636,26.162 30.636,27.813
  region: 21.071,31.618 21.077,29.967 19.071,29.967 19.071,31.618
  region: 37.183,33.909 37.185,33.274 35.183,33.274 35.183,33.909
  region: 22.453,34.417 22.456,33.538 17.272,33.538 17.272,34.417
  region: 22.476,28.067 22.482,26.416 20.476,26.416 20.476,28.067
  region: 47.209,32.974 47.215,31.323 45.21,31.323 45.21,32.974
  region: 47.368,35.433 47.374,33.782 45.368,33.782 45.368,35.433
  region: 51.428,33.782 51.438,31.115 49.432,31.115 49.432,33.782
  region: 51.559,35.433 51.565,33.782 49.559,33.782 49.559,35.433
  region: 24.635,13.335 24.641,11.684 22.635,11.684 22.635,13.335
  region: 26.794,9.271 26.8,7.62 24.794,7.62 24.794,9.271
  region: 27.544,6.358 27.55,4.707 25.544,4.707 25.544,6.358
  region: 21.333,7.747 21.339,6.096 19.333,6.096 19.333,7.747
  region: 22.222,17.78 22.228,16.129 20.222,16.129 20.222,17.78
  region: 46.098,20.184 46.104,18.533 44.098,18.533 44.098,20.184
  region: 42.288,20.066 42.294,18.415 40.288,18.415 40.288,20.066
  region: 22.587,32.639 22.593,30.988 20.587,30.988 20.587,32.639
  region: 20.584,32.639 20.59,30.988 17.285,30.988 17.285,32.639
Keep-Out Layer:
  the board outline again, w0.254

## Silkscreen, mask and mechanical layers (free items; w line width, h text height)
Top Overlay:
  drawing of 590 lines, arcs and shapes, not listed
  text "MAX17055" at 18.161,68.834 h2
  text "ALERT" at 36.322,68.834 h1.52
  text "BAT+" at 9.906,68.707 h2
  text "I2C_SDA" at 52.324,66.819 h1.52
  text "BAT+" at 10.029,64.313 h2
  text "I2C_SCL" at 52.324,64.279 h1.52
  text "GND" at 52.324,61.516 h1.52
  text "BAT-" at 10.029,59.106 h2
  text "RT-" at 51.689,56.134 h2
  text "VTTL" at 41.258,54.564 h1.52
  text "PACK-" at 9.902,53.794 h2
  text "RT+" at 51.689,52.136 h2
  text "+" at 53.721,46.275 h2
  text "BQ34110" at 17.399,45.847 h2
  text "LEN" at 33.667,44.157 h1.52
  text "BAT+" at 9.652,43.688 h2
  text "_" at 53.721,43.282 h2
  text "REG25" at 23.114,42.821 h2
  text "OPT  / EXT  / LOAD" at 50.038,40.64 h1.52
  text "BAT+" at 9.775,39.294 h2
  text "RT+" at 22.274,39.242 h2
  text "I2C_SDA" at 53.252,34.337 h1.52
  text "BAT-" at 9.775,34.087 h2
  text "I2C_SCL" at 53.252,31.797 h1.52
  text "GND" at 53.252,29.034 h1.52
  text "PACK-" at 9.648,28.775 h2
  text "ALERT1" at 51.474,25.049 h1.52
  text "ALERT2" at 51.474,22.509 h1.52
  text "VEN" at 51.475,20 h1.52
  text "LEN" at 51.601,17.175 h1.52
  text ">5V" at 7.747,16.278 h2
  text "GND" at 51.601,14.652 h1.52
  text "CE" at 45.449,13.081 h1.52 r90
  text "PV2" at 40.495,12.602 h1.52 r90
  text "PV1" at 43.162,12.602 h1.52 r90
  text "VEN" at 31.427,11.141 h1.52
  text ">5V" at 7.722,11.051 h2
  text "REG25" at 48.193,9.256 h2
  text "10.8V" at 13.649,7.976 h1.52
  text "<=5V" at 7.722,5.971 h2
  text "RT+" at 50.2,5.627 h2
  text "12V" at 13.776,5.165 h1.52
  text "<=5V" at 7.976,1.145 h2
  text "Battery Management EVM" at 32.893,1.143 h2